# Altium PCB Smartplug.PcbDoc
Units mm, origin at the board's own origin, x right, y up, seen from the top; angles counter-clockwise.
Board outline 80.3 x 43.8 mm, 2 copper layers (Top Layer, Bottom Layer); 28 components, 27 nets, 103 pads, 9 vias.
Unrouted connection lines stored in the file: 52.
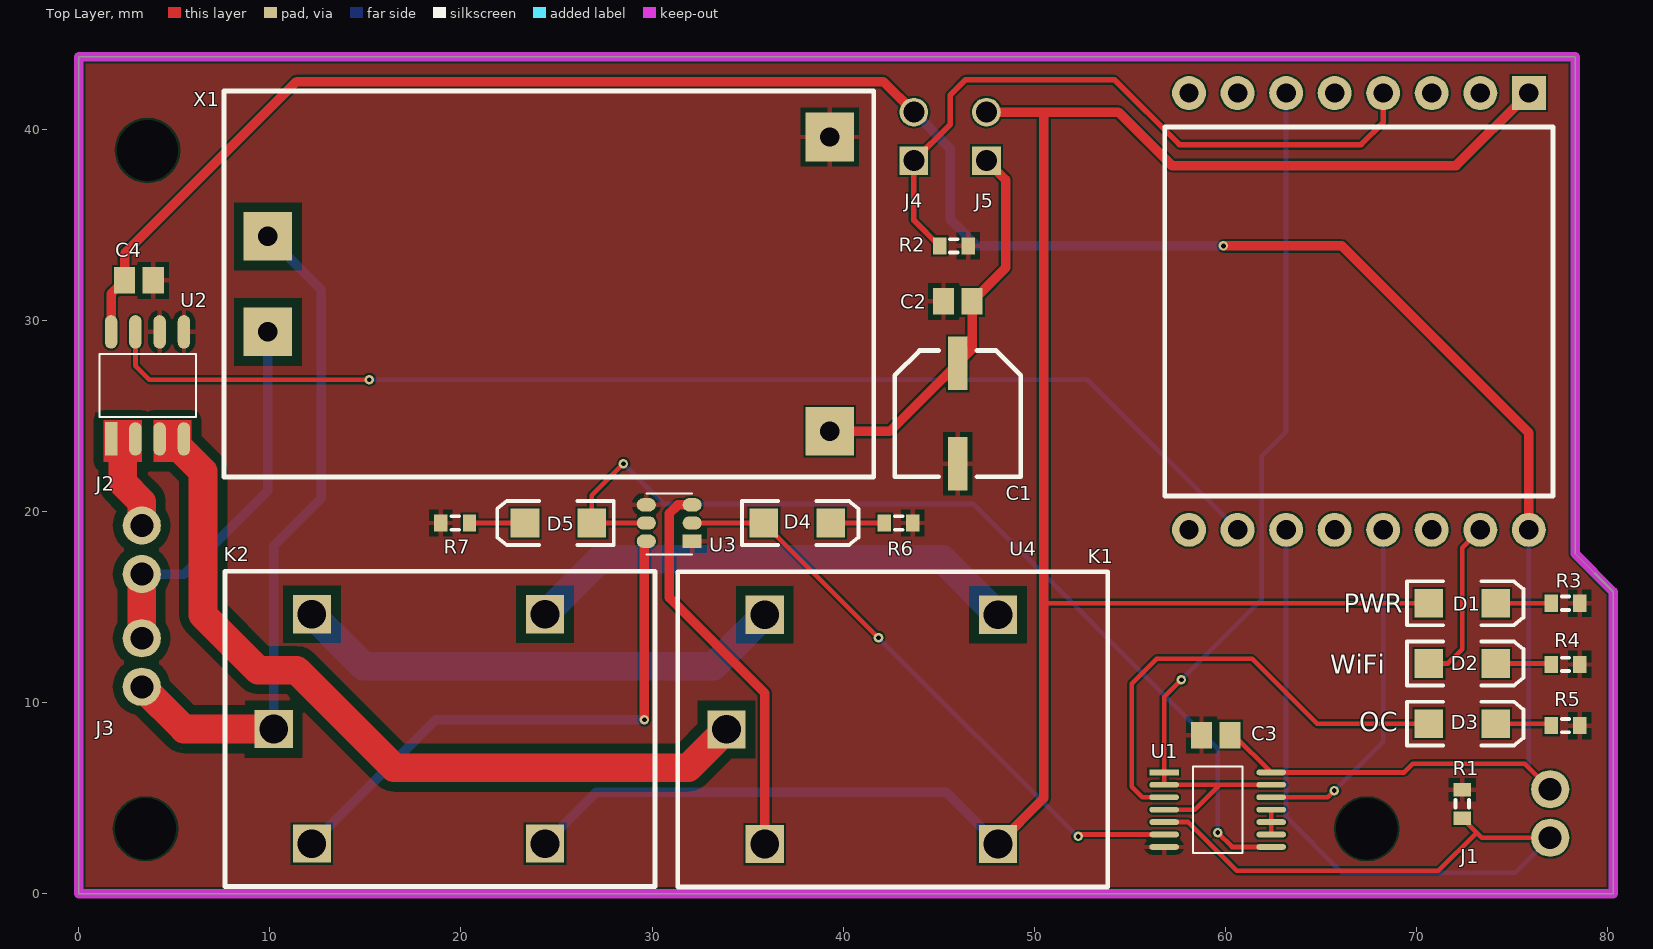
[diagram p0: Top Layer view]
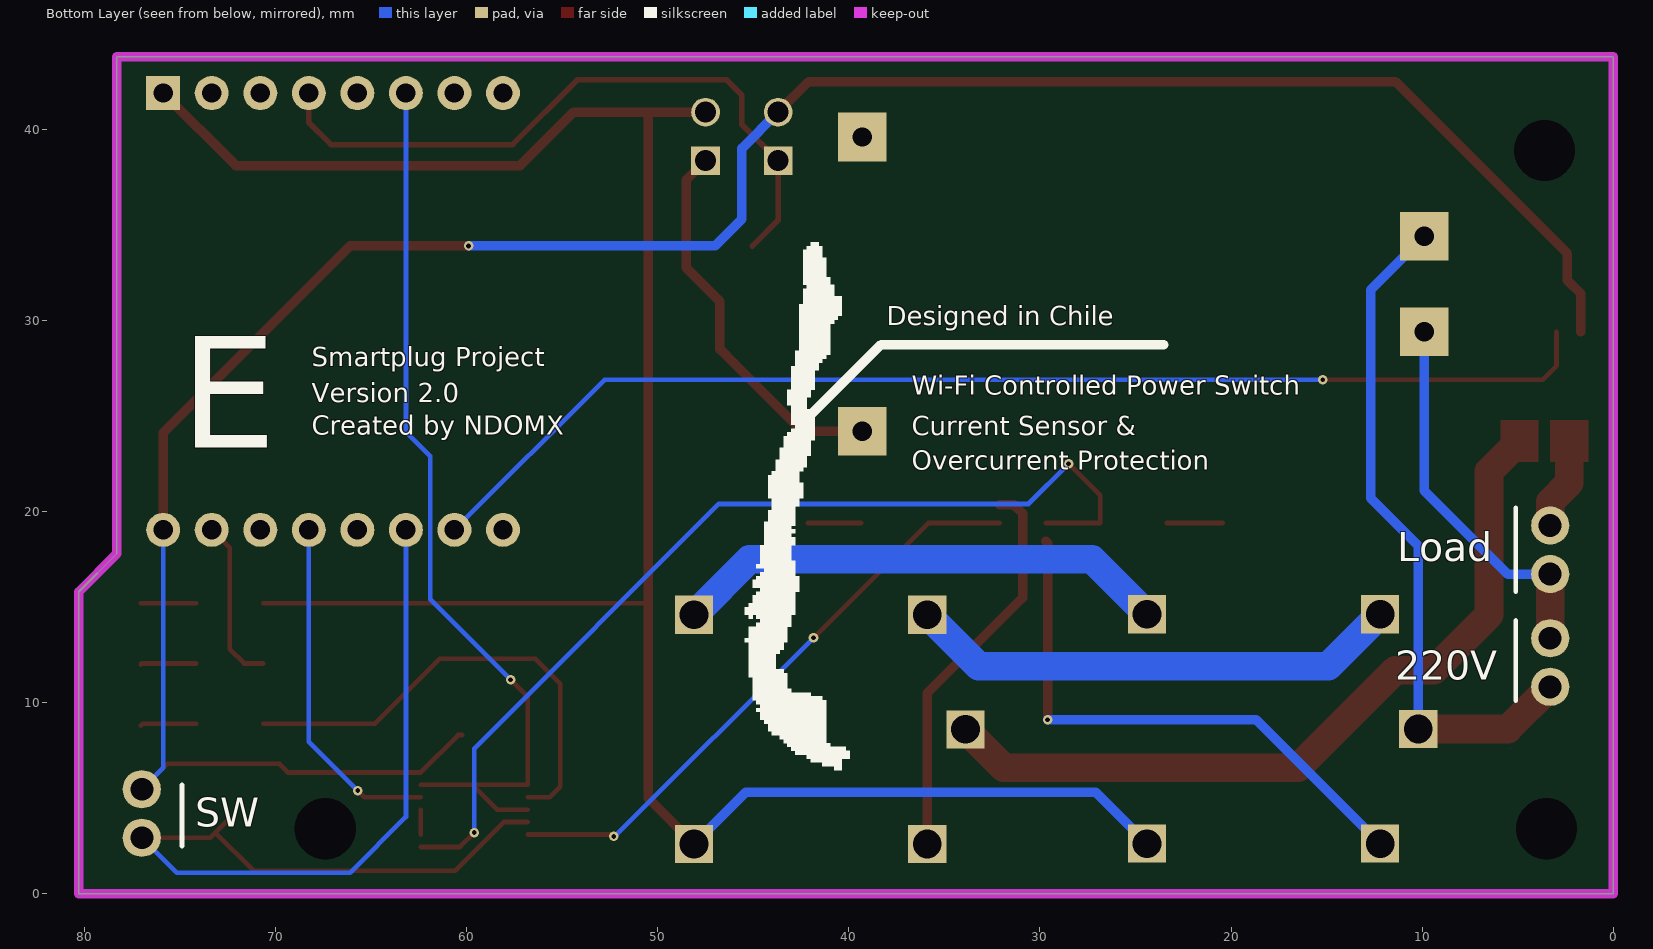
[diagram p1: Bottom Layer view, seen from below]

## Layer stack, top to bottom
Top Solder: solder mask 0.0102, Solder Resist, Dk 3.5
Top Layer: signal copper 0.0356
Dielectric 1: dielectric 0.32, FR-4, Dk 4.8
Bottom Layer: signal copper 0.0356
Bottom Solder: solder mask 0.0102, Solder Resist, Dk 3.5

## Board outline
80.3,0 80.3,15.8 78.3,17.8 78.3,43.8 0,43.8 0,0
cut-out: 5.4,7.6

## Design rules (kind name [scope] priority, off if disabled: settings)
Clearance Clearance_PWR [InNetClass('power')] p1: gap=0.5 ignorepadtopadclearanceinfootprint=FALSE
Clearance [All] p2: gap=0.1 ignorepadtopadclearanceinfootprint=FALSE
ComponentClearance [All vs OnMechanical] p1: gap=0.254 collisioncheckmode=3 verticalgap=0.254 showdistances=FALSE
HoleSize [All] p1: absolutevalues=TRUE maxlimit=4 minlimit=0.025 maxpercent=80.000 minpercent=20.000
MinimumSolderMaskSliver [All] p1: minsoldermaskwidth=0.1
PolygonConnect [All] p1: connectstyle=Relief reliefconductorwidth=0.254 reliefentries=4 polygonreliefangle="90 Angle" airgapwidth=0.254
RoutingVias [All] p1: holewidth=0.5 width=1 viastyle="Through Hole" minholewidth=0.25 minwidth=0.5 maxholewidth=1 maxwidth=2
SilkToSolderMaskClearance [IsPad] p1: minsilkscreentomaskgap=0.1 clearancetoexposedcopper=TRUE
SolderMaskExpansion [All] p1: expansion=0.102
Width Width_PWR [InNetClass('power')] p1: maxlimit=2 minlimit=0.1 preferedwidth=2
Width [All] p2: maxlimit=0.5 minlimit=0.1 preferedwidth=0.25
26 further rules are at their usual default settings.

## Classes and differential pairs
net class power: K1_IN K2_OUT KA KB NetJ2_1 NetJ2_2
component class Designator: C1 C2 D1 J1 J2 J3 J4 J5 K1 K2 R1 R2 R3 X1
component class Designator: C3 C4 D2 D3 D4 D5 R4 R5 R6 R7 U1 U2 U3 U4

## Components (designator, comment, footprint, x,y, rotation, side; value= is the part's Value field where it differs from the comment)
C1 "Cap Pol1" CAP47U 46,25.125 r0 top value=47uF
C2 "Cap" C0805 46,31 r0 top value=33nF
C3 "Cap" C0805 59.5,8.3 r0 top value=100nF
C4 "Cap" C0805 3.15,32.1 r180 top value=100nF
D1 "Power" 3.2X1.6X1.1 72.4,15.2 r0 top
D2 "WiFi connected" 3.2X1.6X1.1 72.4,12.05 r0 top
D3 "Overcurrent" 3.2X1.6X1.1 72.4,8.9 r0 top
D4 "Relay A" 3.2X1.6X1.1 37.6,19.4 r0 top
D5 "Relay B" 3.2X1.6X1.1 25.1,19.4 r180 top
J1 "Input" TBLOCK2 77,4.2 r90 top
J2 "220V" TBLOCK2 3.3,18 r270 top
J3 "220V" TBLOCK2 3.3,12.1 r270 top
J4 "Operation mode" HEADER2 43.7,38.36 r90 top
J5 "External power" HEADER2 47.5,38.36 r90 top
K1 "Relay-SPDT" G5LE-1C 33.9,8.6 r0 top
K2 "Relay-SPDT" G5LE-1C 10.2,8.623 r0 top
R1 "Res3" J1-0603 72.4,4.7 r270 top value=10K
R2 "Res3" J1-0603 45.8,33.9 r180 top value=10K
R3 "Res3" J1-0603 77.8,15.2 r180 top value=470
R4 "Res3" J1-0603 77.8,12 r180 top value=470
R5 "Res3" J1-0603 77.8,8.8 r180 top value=470
R6 "Res3" J1-0603 42.9,19.4 r180 top value=470
R7 "Res3" J1-0603 19.7,19.4 r0 top value=470
U1 "SN74LV" TSSOP14 59.6,4.4 r0 top
U2 "ACS722" SOIC8 3.6,26.6 r90 top
U3 "NUD3160" SC-74 30.9,19.4 r180 top
U4 "Wemos D1 mini" WEMOS_D1 75.88,41.9 r270 top
X1 "AC/DC" HLK-PM01 7.6,21.8 r0 top

## Footprints (in the part's own frame and the unit in brackets; to place one, negate y for a bottom-side part, rotate by r counter-clockwise, add the part's x,y. Pads: shape width x height; smd on the part's side, far side on the other; paste and mask are expansions set on the pad)
3.2X1.6X1.1 [mm] "SMT LED; 2 Flat Leads"
  rect 1.5x1.5 smd: 1(-1.75,0) 2(1.75,0)
  silkscreen extent -2.9,-1.15 3.2,1.15
C0805 [mm] "Chip Capacitor, Body 2.0x1.3mm, IPC High Density"
  rect 1.1x1.4 smd: 1(-0.75,0) 2(0.75,0)
  body extent -1.1,-0.72 1.1,0.72, height 1.4
CAP47U [mm]
  rect 1x2.8 smd: 1(0,2.625) 2(0,-2.625)
  silkscreen extent -3.3,-3.3 3.3,3.3, body extent -3.35,-3.55 3.25,3.85, height 6.15
G5LE-1C [mm]
  rect 2x2 hole 1.5: 1(0,0) 2(2,6) 3(14.2,6) 4(14.2,-6) 5(2,-6)
  silkscreen extent -2.55,-8.25 19.95,8.25, body extent -2.5,-8.2 20,8.3, height 19.5
HEADER2 [mm]
  rect 1.5x1.5 hole 1.1: 1(0,0)
  round 1.5 hole 1.1: 2(2.54,0)
  body extent -1.34,-1.3 3.74,1.2, height 10.54
HLK-PM01 [mm]
  rect 2.54x2.54 hole 1.016: 1(2.3,12.6) 2(2.3,7.6) 3(31.7,17.8) 4(31.7,2.4)
  silkscreen extent 0,0 34,20.2, body extent 0,0 34,20.2, height 15
J1-0603 [mm] "Chip Resistor, Body 1.6x0.8mm, IPC High Density"
  rect 0.7x0.9 smd: 1(-0.75,0) 2(0.75,0)
  silkscreen extent -0.2,-0.35 0.2,0.35, body extent -0.85,-0.48 0.85,0.48, height 0.9
SC-74 [mm]
  rect 1x0.7 smd mask+0.05: 1(-1.2,0.95)
  oval 1x0.7 smd mask+0.05: 2(-1.2,0) 3(-1.2,-0.95) 4(1.2,-0.95) 5(1.2,0) 6(1.2,0.95)
  silkscreen extent -1.2,-1.55 1.2,1.65, body extent -1.39,-1.55 1.3,1.55, height 1.09
SOIC8 [mm]
  rect 1.75x0.65 smd: 1(-2.8,1.905)
  oval 1.75x0.65 smd: 2(-2.8,0.635) 3(-2.8,-0.635) 4(-2.8,-1.905) 5(2.8,-1.905) 6(2.8,-0.635) 7(2.8,0.635) 8(2.8,1.905)
  silkscreen extent -1.65,-2.54 1.65,2.5, body extent -2.95,-2.45 3.05,2.45, height 1.76
TBLOCK2 [mm]
  round 2 hole 1.2: 1(-1.27,0) 2(1.27,0)
  body extent -2.77,-3.2 2.77,3.3, height 10
TSSOP14 [mm]
  rect 1.55x0.3 smd: 1(-2.8,1.95)
  oval 1.55x0.3 smd: 2(-2.8,1.3) 3(-2.8,0.65) 4(-2.8,0) 5(-2.8,-0.65) 6(-2.8,-1.3) 7(-2.8,-1.95) 8(2.8,-1.95) 9(2.8,-1.3) 10(2.8,-0.65) 11(2.8,0) 12(2.8,0.65) 13(2.8,1.3) 14(2.8,1.95)
  silkscreen extent -1.29,-2.28 1.29,2.25, body extent -3.2,-2.5 3.2,2.5, height 1.13
WEMOS_D1 [mil]
  rect 70x70 hole 40: 1(0,0)
  round 70 hole 40: 2(0,-100) 3(0,-200) 4(0,-300) 5(0,-400) 6(0,-500) 7(0,-600) 8(0,-700) 9(900,-700) 10(900,-600) 11(900,-500) 12(900,-400) 13(900,-300) 14(900,-200) 15(900,-100) 16(900,0)
  silkscreen extent 70,-750 830,50, body extent -62,-1004 952,344, height 236

## Part data
C1: "Polarized Capacitor (Radial)", Capacitance=47uF, Case/Package=Radial, Dielectric Material=Aluminium, Leakage Current=3uA, Manufacturer 1=Nichicon, Manufacturer Part Number 1=UWT1E470MCL6GS, Max Operating Temperature=105°C, Min Operating Temperature=-55°C, Package Quantity=1000, Ripple Current=59mA, Supplier Part Number 1=493-9881-6-ND, Tolerance=20%, Voltage Rating=25V, ComponentLink1Description=http://www.mouser.com/ds/2/293/e-wt-30307.pdf?src-supplier=Mouser, ComponentLink1URL=http://www.mouser.com/ds/2/293/e-wt-30307.pdf?src-supplier=Mouser, ComponentLink2Description=https://www.verical.com/server-webapp/html/getDatasheet?partID=732041&src-supplier=Verical, ComponentLink2URL=https://www.verical.com/server-webapp/html/getDatasheet?partID=732041&src-supplier=Verical, ComponentLink3Description=http://www.nichicon.co.jp/english/products/pdfs/e-ch_ref.pdf?src-supplier=Digi-Key, ComponentLink3URL=http://www.nichicon.co.jp/english/products/pdfs/e-ch_ref.pdf?src-supplier=Digi-Key, ComponentLink4Description=http://nichicon-us.com/english/products/pdfs/e-wt.pdf?src-supplier=Future+Electronics, ComponentLink4URL=http://nichicon-us.com/english/products/pdfs/e-wt.pdf?src-supplier=Future+Electronics, ComponentLink5Description=http://www.nichicon.co.jp/english/products/pdfs/e-wt.pdf?src-supplier=Avnet+Europe, ComponentLink5URL=http://www.nichicon.co.jp/english/products/pdfs/e-wt.pdf?src-supplier=Avnet+Europe, Description 1="Aluminum Electrolytic Capacitors - SMD 25volts 47uF 6.3x5.8 20%", Diameter=6.3mm, Dissipation Factor=0.16%, Features="General Purpose", Height=6.6mm, LatestRevisionDate=17-Jul-2002, LatestRevisionNote="Re-released for DXP Platform.", Lead Free="Lead Free", Length=5.8mm, Life (Hours)=1000Hour, Mount="Surface Mount", PackageDescription="Polarized Capacitor (Radial); 2 Leads", PackageReference=RB7.6-15, Packaging="Tape and Reel", Pricing 1="1=0.29, 10=0.202, 100=0.1143, 500=0.08072 (USD)", Published=8-Jun-2000, Publisher="Altium Limited", Radiation Hardening=No, Stock=12722, Supplier 1=Digi-Key, Termination=SMD/SMT, Voltage Rating (DC)=25V
C2: "Capacitor", Capacitance=33nF, Case/Package=0805, Dielectric=X7R, Dielectric Material=Ceramic, Manufacturer 1=KEMET, Manufacturer Part Number 1=C0805C333K5RACTU, Max Operating Temperature=125°C, Min Operating Temperature=-55°C, Supplier Part Number 1=399-1165-6-ND, Tolerance=10%, Voltage=50V, ComponentLink1Description=http://www.kemet.com/kemet/web/homepage/kechome.nsf/vapubfiles/KEM_C1002_X7R_SMD.pdf/$file/KEM_C1002_X7R_SMD.pdf?src-supplier=Element14, ComponentLink1URL=http://www.kemet.com/kemet/web/homepage/kechome.nsf/vapubfiles/KEM_C1002_X7R_SMD.pdf/$file/KEM_C1002_X7R_SMD.pdf?src-supplier=Element14, ComponentLink2Description=http://www.onlinecomponents.com/productFiles/mf-KEM/kem_c1002_x7r_smd.pdf?src-supplier=Onlinecomponents.com, ComponentLink2URL=http://www.onlinecomponents.com/productFiles/mf-KEM/kem_c1002_x7r_smd.pdf?src-supplier=Onlinecomponents.com, Depth=1.25mm, Description 1="KEMET - C0805C333K5RACTU - SMD Multilayer Ceramic Capacitor, 33000 pF, 50 V, 0805 [2012 Metric], ± 10%, X7R, C Series KEMET", Height=0.78mm, LatestRevisionDate=17-Jul-2002, LatestRevisionNote="Re-released for DXP Platform.", Length=2mm, Mount="Surface Mount", PackageDescription="Radial Cap, Thru-Hole; 2 Leads; 0.3 in Pin Spacing", PackageReference=RAD-0.3, Packaging="Tape and Reel", Pricing 1="1=0.12, 10=0.087, 100=0.0407, 500=0.02856, 1000=0.02364 (USD)", Published=8-Jun-2000, Publisher="Altium Limited", Radiation Hardening=No, Stock=116403, Supplier 1=Digi-Key, Termination=SMD/SMT, Voltage Rating (DC)=50V
C3 C4: "Capacitor", Capacitance=100nF, Case/Package=0805, Case Code (Metric)=2012, Dielectric=Y5V, Dielectric Material=Ceramic, Manufacturer 1=KEMET, Manufacturer Part Number 1=C0805C104Z5VACTU, Max Operating Temperature=85°C, Min Operating Temperature=-30°C, Package Quantity=1, Supplier Part Number 1=399-1177-6-ND, Tolerance=80%, Voltage=50V, Case Code (Imperial)=0805, ComponentLink1Description=http://www.alliedelec.com/m/d/9bfe7773041ffe9d406e68bc7b377fdd.pdf?src-supplier=Allied+Electronics, ComponentLink1URL=http://www.alliedelec.com/m/d/9bfe7773041ffe9d406e68bc7b377fdd.pdf?src-supplier=Allied+Electronics, ComponentLink2Description=https://www.verical.com/server-webapp/html/getDatasheet?partID=37101&src-supplier=Verical, ComponentLink2URL=https://www.verical.com/server-webapp/html/getDatasheet?partID=37101&src-supplier=Verical, ComponentLink3Description=https://www.verical.com/server-webapp/html/getDatasheet?partID=321176&src-supplier=Verical, ComponentLink3URL=https://www.verical.com/server-webapp/html/getDatasheet?partID=321176&src-supplier=Verical, ComponentLink4Description=http://www.farnell.com/datasheets/2123124.pdf?src-supplier=Element14, ComponentLink4URL=http://www.farnell.com/datasheets/2123124.pdf?src-supplier=Element14, Depth=1.25mm, Description 1="KEMET         C0805C104Z5VACTU.             CERAMIC CAPACITOR, 0.1UF, 50V, Y5V, +80,-20%, 0805", Dissipation Factor=5%, Height=0.9mm, LatestRevisionDate=17-Jul-2002, LatestRevisionNote="Re-released for DXP Platform.", Lead Free="Lead Free", Lead Pitch=0.75mm, Length=2mm, Mount="Surface Mount,PCB", Number of Pins=2, PackageDescription="Radial Cap, Thru-Hole; 2 Leads; 0.3 in Pin Spacing", PackageReference=RAD-0.3, Packaging="Tape and Reel", Pricing 1="1=0.1, 10=0.057, 100=0.0254, 500=0.01818, 1000=0.01428 (USD)", Published=8-Jun-2000, Publisher="Altium Limited", Radiation Hardening=No, REACH SVHC="No SVHC", Stock=978536, Supplier 1=Digi-Key, Termination=SMD/SMT, Thickness=0.039inch, Voltage Rating=50V, Voltage Rating (DC)=50V, Width=0.049inch
D1: library part LED2, "Typical RED, GREEN, YELLOW, AMBER GaAs LED", Case/Package=1206, Color=Green, Forward Voltage=2.1V, Manufacturer 1=Stanley, Manufacturer Part Number 1=PG1101W-TR, Supplier Part Number 1=404-1046-6-ND, ComponentLink1Description=http://www1.futureelectronics.com/doc/STANLEY/PG1101W-TR.pdf?src-supplier=Future+Electronics, ComponentLink1URL=http://www1.futureelectronics.com/doc/STANLEY/PG1101W-TR.pdf?src-supplier=Future+Electronics, Description 1="LED GREEN CLEAR 3216 SMD", Height=1.5mm, LatestRevisionDate=17-Jul-2002, LatestRevisionNote="Re-released for DXP Platform.", Lead Free="Lead Free", Length=3mm, Lens Style=Clear, Luminous Intensity=4.8mcd, Mount="Surface Mount", PackageDescription="SM LED; 2 Flat Leads", PackageReference=3.2X1.6X1.1, PackageVersion=Feb-2002, Packaging="Cut Tape", Pricing 1="1=0.45, 10=0.316, 100=0.1841, 500=0.12624, 1000=0.1052 (USD)", Published=8-Jun-2000, Publisher="Altium Limited", Stock=64799, Supplier 1=Digi-Key, Viewing Angle=137°, Wavelength=560nm, Width=1.5mm
D2 D3 D4 D5: library part LED2, "Typical RED, GREEN, YELLOW, AMBER GaAs LED", Case/Package=1206, Color=Red, Forward Voltage=1.7V, Manufacturer 1=Stanley, Manufacturer Part Number 1=BR1101W-TR, Supplier Part Number 1=404-1042-6-ND, ComponentLink1Description=http://www1.futureelectronics.com/doc/STANLEY/BR1101W-TR.pdf?src-supplier=Future+Electronics, ComponentLink1URL=http://www1.futureelectronics.com/doc/STANLEY/BR1101W-TR.pdf?src-supplier=Future+Electronics, Description 1="Red 1206 152/141° 12.8 mcd Clear 1.7 V LED Surface Mount", Height=1.5mm, LatestRevisionDate=17-Jul-2002, LatestRevisionNote="Re-released for DXP Platform.", Lead Free="Lead Free", Length=3mm, Lens Style=Clear, Luminous Intensity=12.8mcd, Mount="Surface Mount", PackageDescription="SM LED; 2 Flat Leads", PackageReference=3.2X1.6X1.1, PackageVersion=Feb-2002, Packaging="Cut Tape", Pricing 1="1=0.47, 10=0.334, 100=0.195, 500=0.13368, 1000=0.1114 (USD)", Published=8-Jun-2000, Publisher="Altium Limited", Stock=56287, Supplier 1=Digi-Key, Viewing Angle=141°, Wavelength=660nm, Width=1.5mm
J1 J2 J3: library part "Header 2", "Header, 2-Pin", Color=Green, Current=10A, Flammability Rating="UL94 V-0", Manufacturer 1="TE Connectivity", Manufacturer Part Number 1=282834-2, Max Operating Temperature=105°C, Max Supply Voltage (AC)=150V, Min Operating Temperature=-40°C, Package Quantity=300, Supplier Part Number 1=A98333-ND, Approvals=UL, Closed End="No (Without)", ComponentLink1Description=https://www.alliedelec.com/m/d/020b790adaa0bc8636bbfa0190e2b719.pdf?src-supplier=Allied+Electronics, ComponentLink1URL=https://www.alliedelec.com/m/d/020b790adaa0bc8636bbfa0190e2b719.pdf?src-supplier=Allied+Electronics, ComponentLink2Description=https://www.verical.com/server-webapp/html/getDatasheet?partID=155864&src-supplier=Verical, ComponentLink2URL=https://www.verical.com/server-webapp/html/getDatasheet?partID=155864&src-supplier=Verical, ComponentLink3Description=http://www.te.com/commerce/DocumentDelivery/DDEController?Action=showdoc&DocId=Catalog+Section%7F1308389_EUROSTYLE_TERMINAL_BLOCKS%7F0607%7Fpdf%7FEnglish%7FENG_CS_1308389_EUROSTYLE_TERMINAL_BLOCKS_0607.pdf&src-supplier=Avnet, ComponentLink3URL=http://www.te.com/commerce/DocumentDelivery/DDEController?Action=showdoc&DocId=Catalog+Section%7F1308389_EUROSTYLE_TERMINAL_BLOCKS%7F0607%7Fpdf%7FEnglish%7FENG_CS_1308389_EUROSTYLE_TERMINAL_BLOCKS_0607.pdf&src-supplier=Avnet, ComponentLink4Description=http://www1.futureelectronics.com/doc/TE%20CONNECTIVITY/282834-2.pdf?src-supplier=Future+Electronics, ComponentLink4URL=http://www1.futureelectronics.com/doc/TE%20CONNECTIVITY/282834-2.pdf?src-supplier=Future+Electronics, ComponentLink5Description=https://www.te.com/commerce/DocumentDelivery/DDEController?Action=srchrtrv&DocNm=1308389_EUROSTYLE_TERMINAL_BLOCKS&DocType=CS&DocLang=English&src-supplier=Digi-Key, ComponentLink5URL=https://www.te.com/commerce/DocumentDelivery/DDEController?Action=srchrtrv&DocNm=1308389_EUROSTYLE_TERMINAL_BLOCKS&DocType=CS&DocLang=English&src-supplier=Digi-Key, ComponentLink6Description=http://www.te.com/commerce/DocumentDelivery/DDEController?Action=showdoc&DocId=Catalog+Section%7F1308389_EUROSTYLE_TERMINAL_BLOCKS%7F0607%7Fpdf%7FEnglish%7FENG_CS_1308389_EUROSTYLE_TERMINAL_BLOCKS_0607.pdf&src-supplier=Avnet+Europe, ComponentLink6URL=http://www.te.com/commerce/DocumentDelivery/DDEController?Action=showdoc&DocId=Catalog+Section%7F1308389_EUROSTYLE_TERMINAL_BLOCKS%7F0607%7Fpdf%7FEnglish%7FENG_CS_1308389_EUROSTYLE_TERMINAL_BLOCKS_0607.pdf&src-supplier=Avnet+Europe, ComponentLink7Description=http://www.onlinecomponents.com/productFiles/mf-AMP/eng_cs_1308389_eurostyle_terminal_blocks_0607.pdf?src-supplier=Onlinecomponents.com, ComponentLink7URL=http://www.onlinecomponents.com/productFiles/mf-AMP/eng_cs_1308389_eurostyle_terminal_blocks_0607.pdf?src-supplier=Onlinecomponents.com, Connector Type=Receptacle, Contact Material=Brass, Contact Plating=Tin, Current Rating=10A, Depth=6.5mm, Description 1="TE CONNECTIVITY / BUCHANAN - 282834-2 - TERMINAL BLOCK, WIRE TO BRD, 2POS, 16AWG", ELV=Compliant, Gender=Male, Housing Color=Green, Housing Material=Polyamide, Interlock="No (Without)", LatestRevisionDate=17-Jul-2002, LatestRevisionNote="Re-released for DXP Platform.", Lead Free="Lead Free", Length=5.54mm, Material=Nylon, Max Current Rating=10A, Max Voltage Rating (AC)=150V, Mount="Through Hole", Number of Circuits=2, Number of Contacts=2, Number of Levels=1, Number of Poles=2, Number of Positions=2, Number of Positions Per Level=2, Number of Rows=1, Orientation=Straight, Packaging=Bulk, Pitch=2.54mm, Plating=Brass,Steel, Pricing 1="1=0.92, 10=0.649, 25=0.6048, 50=0.549, 100=0.5467, 250=0.46164, 500=0.43732, 1000=0.38874, 5000=0.36444 (USD)", Publisher="Altium Limited", Radiation Hardening=No, REACH SVHC=Unknown, Screw Flange="No (Without)", Screwless Terminal Block="Yes (With)", Side Stackable="Yes (With)", Stock=18918, Supplier 1=Digi-Key, Tail Length=3.4mm, Termination=Solder, Thread Size=M1.6, Voltage=150V, Voltage Rating=150V, Width=6.5mm, Wire/Cable Gauge=30AWG, Wire Gauge (Max)=30AWG, Wire Gauge (Min)=30AWG
J4 J5: library part "Header 2", "Header, 2-Pin", Color=Black, Current Rating=3A, Flammability Rating="UL94 V-0", Insulation Resistance=5GR, Manufacturer 1="Amphenol FCI", Manufacturer Part Number 1=77311-118-02LF, Max Operating Temperature=125°C, Max Voltage Rating (AC)=1.5kV, Min Operating Temperature=-65°C, Package Quantity=1000, Supplier Part Number 1=609-4434-ND, ComponentLink1Description=https://cdn.amphenol-icc.com/media/wysiwyg/files/drawing/77311.pdf?src-supplier=Digi-Key, ComponentLink1URL=https://cdn.amphenol-icc.com/media/wysiwyg/files/drawing/77311.pdf?src-supplier=Digi-Key, ComponentLink2Description=http://portal.fciconnect.com/Comergent/fci/drawing/77311.pdf?src-supplier=Avnet+Asia, ComponentLink2URL=http://portal.fciconnect.com/Comergent/fci/drawing/77311.pdf?src-supplier=Avnet+Asia, ComponentLink3Description=http://portal.fciconnect.com/Comergent/fci/drawing/77311.pdf?src-supplier=Avnet, ComponentLink3URL=http://portal.fciconnect.com/Comergent/fci/drawing/77311.pdf?src-supplier=Avnet, ComponentLink4Description=https://www.alliedelec.com/m/d/695616ca3fa695a35268331f95f01020.pdf?src-supplier=Allied+Electronics, ComponentLink4URL=https://www.alliedelec.com/m/d/695616ca3fa695a35268331f95f01020.pdf?src-supplier=Allied+Electronics, Connector Type="Male Pin", Contact Gender=Male, Contact Material=Bronze, Contact Mating Length=0.23inch, Contact Plating=Gold,GXT, Contact Post Length=3.05mm, Depth=2.4mm, Description 1="Conn;  Rect;  UnshroudedHdr;  2Cnts;  ThruHole;  BergStik;  2.54mmPin-Spng;  Vert;  SingleRow", Gender=Male, Housing Color=Black, Housing Material=Thermoplastic, LatestRevisionDate=17-Jul-2002, LatestRevisionNote="Re-released for DXP Platform.", Lead Free="Lead Free", Length=5.08mm, Material=Thermoplastic, Mount="Through Hole", Number of Contacts=2, Number of Positions=2, Number of Rows=1, Orientation=Straight, Packaging=Bulk, Pitch=2.54mm, Pricing 1="1=0.19, 10=0.182, 100=0.1258, 500=0.10648, 1000=0.08712, 5000=0.07744, 10000=0.07018 (USD)", Publisher="Altium Limited", Radiation Hardening=No, REACH SVHC="No SVHC", Stock=85355, Supplier 1=Digi-Key, Termination=Solder, Voltage Rating=1.5kV
K1 K2: "Single-Pole Dual-Throw Relay", Coil Current=133mA, Coil Power=400mW, Coil Resistance=22.5R, Coil Voltage (DC)=3V, Contact Current Rating=10A, Manufacturer 1=Omron, Manufacturer Part Number 1=G5LE-14-DC3, Max Operating Temperature=85°C, Max Voltage Rating (AC)=250V, Max Voltage Rating (DC)=125V, Min Operating Temperature=-25°C, Package Quantity=500, Supplier Part Number 1=Z3326-ND, Coil Type=Non-Latching, ComponentLink1Description=https://omronfs.omron.com/en_US/ecb/products/pdf/en-g5le.pdf?src-supplier=Digi-Key, ComponentLink1URL=https://omronfs.omron.com/en_US/ecb/products/pdf/en-g5le.pdf?src-supplier=Digi-Key, Contact Material=Tin,Silver, Description 1="RELAY GEN PURPOSE SPDT 10A 3V", LatestRevisionDate=17-Jul-2002, LatestRevisionNote="Re-released for DXP Platform.", Max Current Rating=10A, Mount="Through Hole", Number of Pins=5, Operate Time=10ms, PackageReference=MODULE5B, Packaging=Tray, Pricing 1="1=1.44, 10=1.35, 25=1.2004, 50=1.1404, 100=1.0804, 250=0.96032, 500=0.9003, 1000=0.84028, 5000=0.81027 (USD)", Published=24-Mar-1999, Publisher="Altium Limited", Radiation Hardening=No, Relay Type="General Purpose", Release Time=5ms, Stock=12824, Supplier 1=Digi-Key, Termination="PC Pin", Throw Configuration=SPDT, Weight=12g
R1 R2: "Resistor", Case/Package=0603, Case Code (Metric)=1608, Manufacturer 1=Panasonic, Manufacturer Part Number 1=ERJ-3GEYJ103V, Max Operating Temperature=155°C, Max Power Dissipation=100mW, Min Operating Temperature=-55°C, Package Quantity=1, Resistance=10kR, Supplier Part Number 1=P10KGDKR-ND, Temperature Coefficient=200ppm/°C, Tolerance=5%, Voltage Rating=75V, Voltage Rating (DC)=50V, Case Code (Imperial)=0603, ComponentLink1Description=http://www.farnell.com/datasheets/2059623.pdf?src-supplier=Element14, ComponentLink1URL=http://www.farnell.com/datasheets/2059623.pdf?src-supplier=Element14, ComponentLink2Description=http://industrial.panasonic.com/www-cgi/jvcr13pz.cgi?E+PZ+3+AOA0002+ERJ1GNJ120C+7+WW?src-supplier=Mouser, ComponentLink2URL=http://industrial.panasonic.com/www-cgi/jvcr13pz.cgi?E+PZ+3+AOA0002+ERJ1GNJ120C+7+WW?src-supplier=Mouser, ComponentLink3Description=http://industrial.panasonic.com/www-data/pdf/AOA0000/AOA0000CE1.pdf?src-supplier=Avnet+Europe, ComponentLink3URL=http://industrial.panasonic.com/www-data/pdf/AOA0000/AOA0000CE1.pdf?src-supplier=Avnet+Europe, ComponentLink4Description=http://www.jameco.com/Jameco/Products/ProdDS/2007265.pdf?src-supplier=Jameco, ComponentLink4URL=http://www.jameco.com/Jameco/Products/ProdDS/2007265.pdf?src-supplier=Jameco, ComponentLink5Description=http://industrial.panasonic.com/www-data/pdf/AOA0000/AOA0000CE1.pdf?src-supplier=Avnet, ComponentLink5URL=http://industrial.panasonic.com/www-data/pdf/AOA0000/AOA0000CE1.pdf?src-supplier=Avnet, ComponentLink6Description=https://industrial.panasonic.com/cdbs/www-data/pdf/RDA0000/AOA0000C301.pdf?src-supplier=Future+Electronics, ComponentLink6URL=https://industrial.panasonic.com/cdbs/www-data/pdf/RDA0000/AOA0000C301.pdf?src-supplier=Future+Electronics, Composition="Thick Film", Contact Plating=Tin, Depth=0.8mm, Description 1="Res Thick Film 0603 10K Ohm 5% 1/10W ±200ppm/°C Molded SMD Punched Carrier T/R", Features="Automotive AEC-Q200", Height=0.45mm, LatestRevisionDate=29-May-2009, LatestRevisionNote="IPC-7351 Footprint Added.", Lead Free="Lead Free", Length=1.6mm, Military Standard=Not, Mount="Surface Mount", Number of Terminations=2, PackageDescription="Chip Resistor", PackageReference=J1-0603, Packaging="Tape and Reel", Power Rating=100mW, Pricing 1="1=0.1, 10=0.038, 100=0.0156, 1000=0.007, 2500=0.00607 (USD)", Published=8-Jun-2000, Publisher="Altium Limited", REACH SVHC="No SVHC", Stock=22255773, Supplier 1=Digi-Key, Termination=SMD/SMT, Weight=7.1E-05oz, Width=0.8mm, Working Voltage=75V
R3 R4 R5 R6 R7: "Resistor", Case/Package=0603, Case Code (Metric)=1608, Manufacturer 1="TE Connectivity", Manufacturer Part Number 1=CRGCQ0603J470R, Max Operating Temperature=155°C, Max Power Dissipation=100mW, Min Operating Temperature=-55°C, Resistance=470R, Supplier Part Number 1=A130089DKR-ND, Temperature Coefficient=100ppm/°C, Tolerance=5%, Case Code (Imperial)=0603, ComponentLink1Description=https://4donline.ihs.com/images/VipMasterIC/IC/TYEL/TYEL-S-A0004929575/TYEL-S-A0004929575-1.pdf?hkey=52A5661711E402568146F3353EA87419&src-supplier=Farnell, ComponentLink1URL=https://4donline.ihs.com/images/VipMasterIC/IC/TYEL/TYEL-S-A0004929575/TYEL-S-A0004929575-1.pdf?hkey=52A5661711E402568146F3353EA87419&src-supplier=Farnell, ComponentLink2Description=https://4donline.ihs.com/images/VipMasterIC/IC/TYEL/TYEL-S-A0004929575/TYEL-S-A0004929575-1.pdf?hkey=52A5661711E402568146F3353EA87419&src-supplier=Newark, ComponentLink2URL=https://4donline.ihs.com/images/VipMasterIC/IC/TYEL/TYEL-S-A0004929575/TYEL-S-A0004929575-1.pdf?hkey=52A5661711E402568146F3353EA87419&src-supplier=Newark, ComponentLink3Description=https://www.te.com/commerce/DocumentDelivery/DDEController?Action=srchrtrv&amp;DocNm=1773204-3&amp;DocType=DS&amp;DocLang=English&src-supplier=Digi-Key, ComponentLink3URL=https://www.te.com/commerce/DocumentDelivery/DDEController?Action=srchrtrv&amp;DocNm=1773204-3&amp;DocType=DS&amp;DocLang=English&src-supplier=Digi-Key, ComponentLink4Description=https://www.te.com/commerce/DocumentDelivery/DDEController?Action=srchrtrv&DocNm=1773204-3&DocType=DS&DocLang=English&src-supplier=Digi-Key, ComponentLink4URL=https://www.te.com/commerce/DocumentDelivery/DDEController?Action=srchrtrv&DocNm=1773204-3&DocType=DS&DocLang=English&src-supplier=Digi-Key, Composition="Thick Film", Description 1="TE CONNECTIVITY - CRGCQ0603J470R - RES, 470R, 5%, 0603, THICK FILM", Features="Moisture Resistant,Automotive AEC-Q200", LatestRevisionDate=29-May-2009, LatestRevisionNote="IPC-7351 Footprint Added.", Number of Terminations=2, PackageDescription="Chip Resistor", PackageReference=J1-0603, Packaging="Tape and Reel", Pricing 1="1=0.1, 10=0.021, 100=0.0086, 1000=0.00387, 2500=0.00336 (USD)", Published=8-Jun-2000, Publisher="Altium Limited", Stock=87954, Supplier 1=Digi-Key
U1: library part SN74LVC00APWR, "IC GATE NAND 4CH 2-INP 14-SSOP", Case/Package=TSSOP, High Level Output Current=-24mA, Low Level Output Current=24mA, Manufacturer 1="Texas Instruments", Max Operating Temperature=125°C, Max Supply Voltage=3.6V, Min Operating Temperature=-40°C, Min Supply Voltage=1.65V, Package Quantity=1, Quiescent Current=1uA, Supplier Part Number 1=296-1216-6-ND, ComponentLink1Description=http://www.ti.com/lit/ds/symlink/sn74lvc00a.pdf?src-supplier=Digi-Key, ComponentLink1URL=http://www.ti.com/lit/ds/symlink/sn74lvc00a.pdf?src-supplier=Digi-Key, ComponentLink2Description=http://www.ti.com/general/docs/lit/getliterature.tsp?genericPartNumber=SN54LVC00A&&fileType=pdf&src-supplier=Avnet, ComponentLink2URL=http://www.ti.com/general/docs/lit/getliterature.tsp?genericPartNumber=SN54LVC00A&&fileType=pdf&src-supplier=Avnet, ComponentLink3Description=http://www.ti.com/general/docs/lit/getliterature.tsp?genericPartNumber=SN74LVC00A&amp;&amp;fileType=pdf&src-supplier=Newark, ComponentLink3URL=http://www.ti.com/general/docs/lit/getliterature.tsp?genericPartNumber=SN74LVC00A&amp;&amp;fileType=pdf&src-supplier=Newark, ComponentLink4Description=http://www.farnell.com/datasheets/1764343.pdf?src-supplier=Element14, ComponentLink4URL=http://www.farnell.com/datasheets/1764343.pdf?src-supplier=Element14, ComponentLink5Description=http://www.farnell.com/datasheets/2018849.pdf?src-supplier=Element14, ComponentLink5URL=http://www.farnell.com/datasheets/2018849.pdf?src-supplier=Element14, ComponentLink6Description=http://www.produktinfo.conrad.com/datenblaetter/1000000-1099999/001017089-da-01-en-IC_QUA_2IN_PO_SN74LVC00APWR_TSSOP_14_TID.pdf?src-supplier=Conrad, ComponentLink6URL=http://www.produktinfo.conrad.com/datenblaetter/1000000-1099999/001017089-da-01-en-IC_QUA_2IN_PO_SN74LVC00APWR_TSSOP_14_TID.pdf?src-supplier=Conrad, Contact Plating=Gold, Description 1="IC GATE NAND 4CH 2-INP 14TSSOP", Height=1.15mm, Lead Free="Lead Free", Length=5mm, Logic Function=NAND, Manufacturer Part Number 1=SN74LVC00APWR, Max Output Current=24mA, Mount="Surface Mount", Number of Bits=4, Number of Circuits=4, Number of Elements=4, Number of Gates=4, Number of Input Lines=2, Number of Inputs=2, Number of Output Lines=1, Number of Outputs=1, Number of Pins=14, Output Current=24mA, Packaging="Tape and Reel", Pricing 1="1=0.41, 10=0.308, 100=0.1918, 500=0.13122, 1000=0.10094 (USD)", Propagation Delay=4.1ns, Radiation Hardening=No, REACH SVHC="No SVHC", Schmitt Trigger Input=No, Stock=19024, Supplier 1=Digi-Key, Termination=SMD/SMT, Turn-On Delay Time=4.3ns, Weight=0.002018oz, Width=4.4mm
U2: library part ACS722LLCTR-20AB-T, "SENSOR CURRENT HALL 20A AC/DC", Case/Package=SOIC, Current Sensing=20A, Frequency=80kHz, Manufacturer 1="Allegro MicroSystems", Max Input Voltage=3.6V, Max Supply Current=12mA, Min Input Voltage=3V, Quiescent Current=9mA, Supplier Part Number 1=620-1637-6-ND, Accuracy=3%, Bandwidth=80kHz, ComponentLink1Description=https://www.allegromicro.com/~/media/Files/Datasheets/ACS722-Datasheet.ashx?src-supplier=Digi-Key, ComponentLink1URL=https://www.allegromicro.com/~/media/Files/Datasheets/ACS722-Datasheet.ashx?src-supplier=Digi-Key, ComponentLink2Description=http://www.allegromicro.com/~/media/Files/Datasheets/ACS722-Datasheet.ashx?src-supplier=Digi-Key, ComponentLink2URL=http://www.allegromicro.com/~/media/Files/Datasheets/ACS722-Datasheet.ashx?src-supplier=Digi-Key, Description 1="SENSOR CURRENT HALL 20A AC/DC", Height=1.5mm, Length=4.9mm, Linearity=1%, Manufacturer Part Number 1=ACS722LLCTR-20AB-T, Number of Channels=1, Number of Pins=8, Packaging="Tape and Reel", Polarity=Bidirectional, Pricing 1="1=4.91, 5=4.332, 10=3.827, 25=3.1052, 50=2.7442, 100=2.672, 500=2.23866, 1000=2.09424 (USD)", Response Time=5us, Sensitivity=66mV/A, Stock=4729, Supplier 1=Digi-Key, Width=3.9mm
U3: library part NUD3160DMT1G, "IC INDCT LOAD DRVR INDUST SC74-6", Case/Package=SC, Continuous Drain Current (ID)=150mA, Current Rating=263mA, Drain to Source Breakdown Voltage=60V, Drain to Source Resistance=1.8R, Gate to Source Voltage (Vgs)=12V, Manufacturer 1="ON Semiconductor", Max Operating Temperature=125°C, Min Operating Temperature=-40°C, On-State Resistance=3.7R, Output Current=200mA, Output Voltage=61V, Package Quantity=3000, Power Dissipation=380mW, Supplier Part Number 1=NUD3160DMT1GOSDKR-ND, ComponentLink1Description=http://www.onsemi.com/pub_link/Collateral/NUD3160-D.PDF?src-supplier=Digi-Key, ComponentLink1URL=http://www.onsemi.com/pub_link/Collateral/NUD3160-D.PDF?src-supplier=Digi-Key, ComponentLink2Description=http://www.onsemi.ru.com/pub/Collateral/NUD3160-D.PDF?src-supplier=Avnet+Europe, ComponentLink2URL=http://www.onsemi.ru.com/pub/Collateral/NUD3160-D.PDF?src-supplier=Avnet+Europe, ComponentLink3Description=http://www.onsemi.com/pub/Collateral/NUD3160-D.PDF?src-supplier=Digi-Key, ComponentLink3URL=http://www.onsemi.com/pub/Collateral/NUD3160-D.PDF?src-supplier=Digi-Key, ComponentLink4Description=http://www.onsemi.cn/pub_link/Collateral/NUD3160-D.PDF?src-supplier=Avnet, ComponentLink4URL=http://www.onsemi.cn/pub_link/Collateral/NUD3160-D.PDF?src-supplier=Avnet, ComponentLink5Description=http://www.onsemi.ru.com/pub/Collateral/NUD3160-D.PDF?src-supplier=Avnet, ComponentLink5URL=http://www.onsemi.ru.com/pub/Collateral/NUD3160-D.PDF?src-supplier=Avnet, Contact Plating=Tin,Matte, Description 1="IC INDCT LOAD DRVR INDUST SC74-6", Drain to Source Voltage (Vdss)=60V, Element Configuration=Dual, Fall Time=600ns, Halogen Free="Halogen Free", Height=0.94mm, Interface=On/Off, Lead Free="Lead Free", Length=3mm, Manufacturer Part Number 1=NUD3160DMT1G, Max Output Current=150mA, Max Supply Voltage=60V, Mount="Surface Mount", Number of Elements=2, Number of Outputs=2, Number of Pins=6, Output Configuration="Low Side", Packaging="Tape and Reel", Pricing 1="1=0.45, 10=0.367, 100=0.2264, 500=0.17176, 1000=0.12882 (USD)", Radiation Hardening=No, REACH SVHC="No SVHC", Rise Time=600ns, Stock=11786, Supplier 1=Digi-Key, Width=1.5mm
U4: library part ESP8266, "ESP8266 based MCU with Wi-Fi", Manufacturer 1=Wemos, Manufacturer Part Number 1="D1 mini", ComponentLink1Description=Datasheet, ComponentLink1URL=https://docs.wemos.cc/en/latest/d1/d1_mini.html
X1: library part HLK-PM01, "220Vac to 5Vdc converter (3W)", Manufacturer 1=Hi-Link, Manufacturer Part Number 1=PM01, ComponentLink1Description=Datasheet, ComponentLink1URL=https://datasheet.lcsc.com/szlcsc/1909111105_HI-LINK-HLK-PM24_C399250.pdf

## Free pads (board coordinates)
  round 2 hole 3.2: 90(3.6,38.9) 91(3.5,3.4) 92(67.4,3.4)

## Via types
v1: diameter 0.5, hole 0.25, Top Layer to Bottom Layer, 9 vias

## Nets (pads, with @x,y where several pads share a name; then routed paths per layer and width w, separated by ;. In a path a pad name is that pad's centre, name@x,y a point inside that pad or via, vN(x,y) a via of type N, cw(c..) or ccw(c..) an arc to the next point about the centre after c; other vN are vias at no path point)
3V3: C3.2 C4.2 J1.2 J4.2 U1.14 U2.8 U4.16 | length 128.8
  Top Layer w0.25: C3.2 60.45,8.3 U1.14 69.35,6.35 69.8,6.8 75.67,6.8 J1.2
  Top Layer w0.5: U2.8 1.695,31.395 C4.2 2.4,33.5 11.4,42.5 42.1,42.5 J4.2 ; v1(59.9,33.9) 66.1,33.9 75.88,24.12 U4.16
  Bottom Layer w0.25: U4.16 75.88,6.59 J1.2
  Bottom Layer w0.5: J4.2 45.6,39 45.6,35.3 47,33.9 v1(59.9,33.9)
5V: D1.1 J5.2 K1.4 K2.4 U4.1 | length 116.5
  Top Layer w0.25: 50.5,15.2 D1.1
  Top Layer w0.5: J5.2 50.5,40.9 ; K1.4 50.5,5 50.5,15.2 50.5,40.9 ; U4.1 72.08,38.1 57.2,38.1 54.4,40.9 50.5,40.9
  Bottom Layer w0.5: K2.4 27.077,5.3 45.4,5.3 K1.4
ADC: U2.7 U4.10 | length 63
  Top Layer w0.25: U2.7 2.965,27.635 3.7,26.9 v1(15.2,26.9)
  Bottom Layer w0.25: v1(15.2,26.9) 52.78,26.9 U4.10
GND: C1.2 C2.1 C3.1 C4.1 R1.1 R2.1 R3.1 R4.1 R5.1 R6.1 R7.1 U1.7 U2.5 U2.6 U3.1 U3.4 X1.3
K1_IN: K1.1 U2.3 U2.4 | length 41.3
  Top Layer w1.5: 4.9,23.7 6.5,22.1 6.5,14.6 9.4,11.7 11.4,11.7 16.5,6.6 31.9,6.6 K1.1
K2_OUT: J3.2 K2.1 X1.1 | length 35.8
  Top Layer w1.5: J3.2 5.507,8.623 K2.1
  Bottom Layer w0.5: X1.1 12.7,31.6 12.7,20.7 10.2,18.2 K2.1
KA: K1.2 K2.2 | length 25.9
  Bottom Layer w1.5: K2.2 14.923,11.9 33.2,11.9 K1.2
KB: K1.3 K2.3 | length 26.1
  Bottom Layer w1.5: K2.3 27.277,17.5 45.2,17.5 K1.3
NetC1_1: C1.1 C2.2 J5.1 X1.4 | length 20.2
  Top Layer w0.5: X1.4 42.45,24.2 C1.1 46.75,28.5 C2.2 48.5,32.75 48.5,37.36 J5.1
NetD1_2: D1.2 R3.2 | length 2.9
  Top Layer w0.25: D1.2 R3.2
NetD2_2: D2.2 R4.2 | length 2.9
  Top Layer w0.25: D2.2 77,12.05 R4.2
NetD3_2: D3.2 R5.2 | length 2.9
  Top Layer w0.25: D3.2 76.95,8.9 R5.2
NetD4_2: D4.2 R6.2 | length 2.8
  Top Layer w0.25: D4.2 R6.2
NetD5_2: D5.2 R7.2 | length 2.9
  Top Layer w0.25: R7.2 D5.2
NetJ2_1: J2.1 U2.1 U2.2 | length 5
  Top Layer w1.5: 2.3,23.9 2.3,21.5 3.3,20.5 J2.1
NetJ2_2: J2.2 J3.1 X1.2 | length 20.1
  Top Layer w1.5: J3.1 J2.2
  Bottom Layer w0.5: J2.2 5.53,16.73 9.9,21.1 X1.2
NetJ4_1: J4.1 R2.2 U4.4 | length 35.7
  Top Layer w0.3: R2.2 43.7,35.25 J4.1 45.6,40.26 45.6,41.8 46.4,42.6 54.2,42.6 57.6,39.2 67.1,39.2 68.26,40.36 U4.4
NetK1_5: K1.5 U3.3 | length 20.8
  Top Layer w0.5: U3.3 31.35,20.35 30.9,19.9 30.9,15.5 35.9,10.5 K1.5
NetK2_5: K2.5 U3.6 | length 29.5
  Top Layer w0.5: v1(29.6,9.1) 29.6,18.35 U3.6
  Bottom Layer w0.5: K2.5 18.677,9.1 v1(29.6,9.1)
NetU1_9: U1.9 U1.10 U1.11 | length 1.3
  Top Layer w0.25: U1.9 U1.10 U1.11
OC: D3.1 U1.3 | length 24.8
  Top Layer w0.25: U1.3 55.65,5.05 55.1,5.6 55.1,11 56.4,12.3 61.4,12.3 64.8,8.9 D3.1
RA: D4.1 U1.6 U3.2 | length 31.5
  Top Layer w0.25: U3.2 D4.1 v1(41.85,13.4) ; v1(52.3,3) 52.4,3.1 U1.6
  Bottom Layer w0.25: v1(41.85,13.4) 52.25,3 v1(52.3,3)
RB: D5.1 U1.8 U3.5 | length 51.4
  Top Layer w0.25: v1(28.5,22.5) 26.85,20.85 D5.1 U3.5 ; v1(59.6,3.2) 60.35,2.45 U1.8
  Bottom Layer w0.25: v1(28.5,22.5) 30.6,20.4 46.8,20.4 59.6,7.6 v1(59.6,3.2)
SWIN: J1.1 R1.2 U1.5 U4.11 | length 54.1
  Top Layer w0.25: U1.5 58.05,3.75 60.6,1.2 71.15,1.2 73.15,3.2 ; R1.2 73.15,3.2 ; J1.1 73.42,2.93 73.15,3.2
  Bottom Layer w0.25: U4.11 63.18,4.02 66.1,1.1 75.17,1.1 J1.1
SWOUT: U1.12 U4.13 | length 18.1
  Top Layer w0.25: U1.12 65.35,5.05 v1(65.7,5.4)
  Bottom Layer w0.25: v1(65.7,5.4) 68.26,7.96 U4.13
WIFI_ON: D2.1 U4.15 | length 8.7
  Top Layer w0.25: D2.1 71.65,12.05 72.4,12.8 72.4,18.1 U4.15
~OC: U1.1 U1.2 U1.4 U1.13 U4.6 | length 47.9
  Top Layer w0.25: U1.4 58.4,4.4 59.7,5.7 ; v1(57.7,11.2) 56.8,10.3 U1.1 U1.2 59.7,5.7 ; U1.13 59.7,5.7
  Bottom Layer w0.25: v1(57.7,11.2) 61.9,15.4 61.9,22.9 63.18,24.18 U4.6
pads on no net: U4.2 U4.3 U4.5 U4.7 U4.8 U4.9 U4.12 U4.14

## Polygon pours and split planes (outlines as drawn)
GND on Top Layer "GND_L01_P002" (solid, pour order 2): 80.3,0 80.3,15.8 78.3,17.8 78.3,43.8 0,43.8 0,0

## Keep-outs
Keep-Out Layer:
  the board outline again, w0.5

## Other copper
Top Layer:
  rectangle net NetJ2_1: 1.3,22.6 3.3,24.8
  rectangle net K1_IN: 3.9,22.6 5.9,24.8
Bottom Layer:
  pour cut-out: 45.8,43.1

## Silkscreen, mask and mechanical layers (free items; w line width, h text height)
Top Overlay:
  text "PWR" at 66.2,14.7 h1
  text "WiFi" at 65.5,11.5 h1
  text "OC" at 67,8.5 h1
Bottom Overlay:
  drawing of 8 lines, arcs and shapes, not listed
  text "Designed in Chile" at 38.013,29.738 h1
  text "Smartplug Project" at 68.1,27.6 h1
  text "Wi-Fi Controlled Power Switch" at 36.7,26.1 h1
  text "Version 2.0" at 68.1,25.717 h1
  text "Current Sensor &" at 36.7,24 h1
  text "Created by NDOMX" at 68.1,24.017 h1
  text "Overcurrent Protection" at 36.7,22.2 h1
  text "E" at 75,21.417 h10
  text "Load" at 11.3,17.4 h1.5
  text "220V" at 11.4,11.2 h1.5
  text "SW" at 74.2,3.5 h1.5

## Dimensions
78.3,43.8 to 80.3,0 on Mechanical 1
0,43.8 to 78.3,43.8 on Mechanical 1